# EAGLE board wt12_breakout_board_laen (EAGLE 5.09)
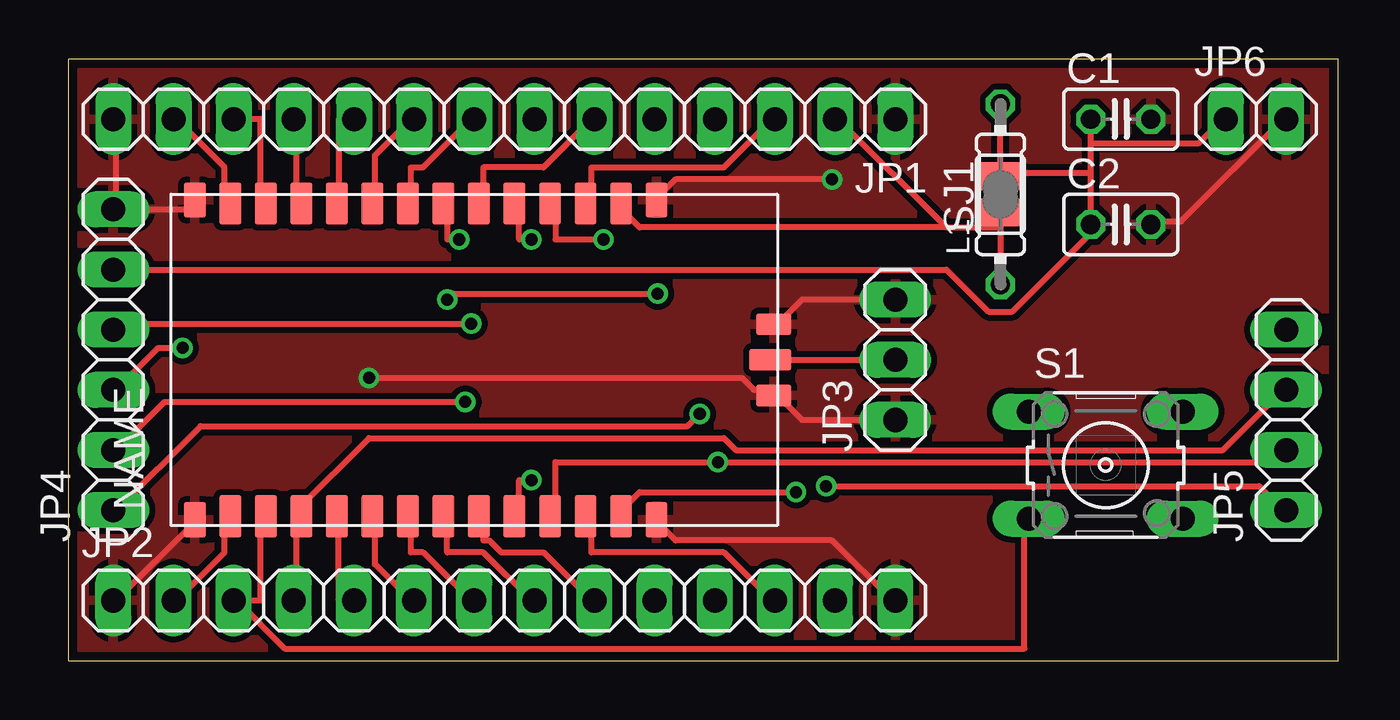
[diagram p0: board, top side]
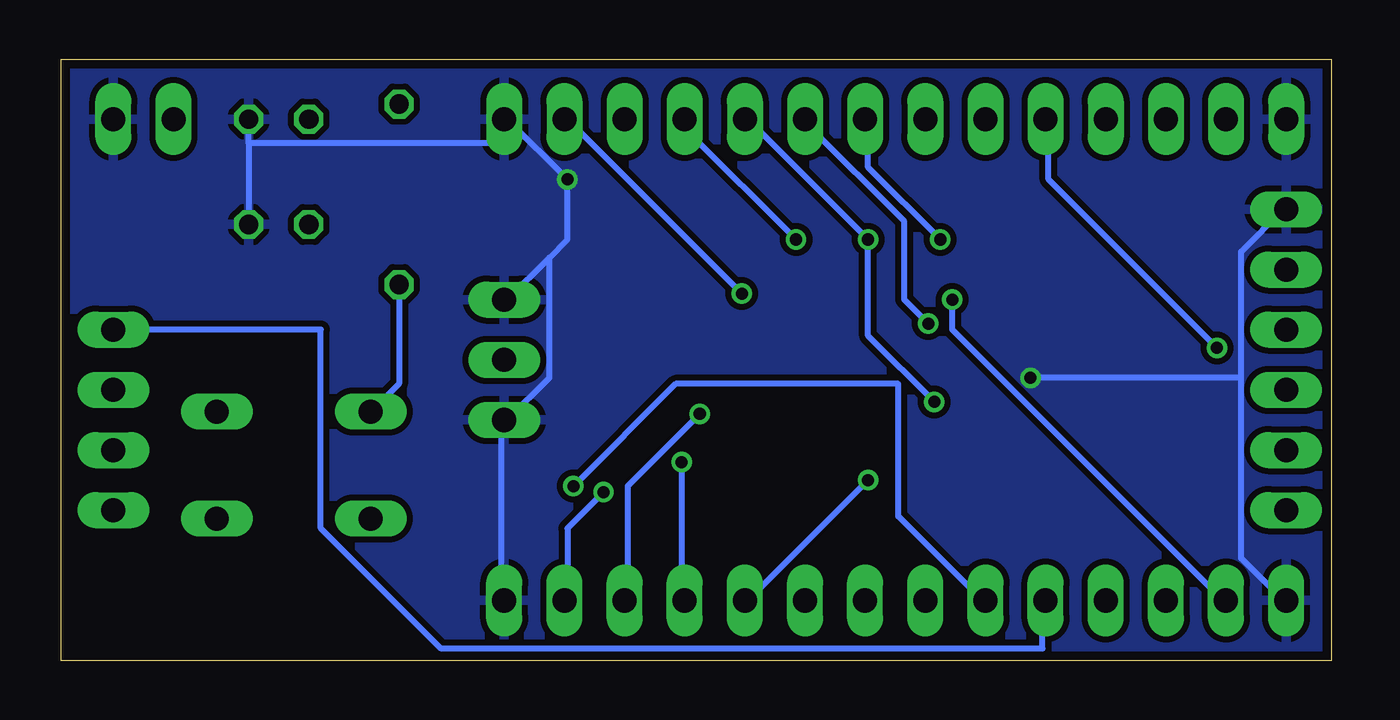
[diagram p1: board, bottom side, seen from below]

Size 53.65 x 25.39 mm. Coordinates in mm from the lower left corner, seen from the top.
Outline: 0,0 53.65,0 53.65,25.39 0,25.39 0,0
Copper layers (1*16): Top 0.0356mm / dielectric 1.5011mm / Bottom 0.0356mm
Design rules "LaenPCBOrder": minimum track width 6mil, minimum drill 13mil, track to track 6mil, track to pad 6mil, pad to pad 6mil, via to via 6mil, smd to smd 6mil, copper to edge 15mil, drill to drill 6mil, minimum pad ring 7mil, minimum via ring 7mil, stop-mask expansion 4mil, vias tented up to drill 0mil, thermal gap 10mil
Net classes: 0 default: width 0.254 mm, drill 0.508 mm, clearance 0.254 mm

## Footprints (pad centres in the part's own frame; a part is rotated, then mirrored left to right if it is on the bottom)
C025-025X050 = drill 0.813 octagon: 1 -1.27,0; 2 1.27,0
1X14 = drill 1.016 long: 1 -16.51,0; 2 -13.97,0; 3 -11.43,0; 4 -8.89,0; 5 -6.35,0; 6 -3.81,0; 7 -1.27,0; 8 1.27,0; 9 3.81,0; 10 6.35,0; 11 8.89,0; 12 11.43,0; 13 13.97,0; 14 16.51,0
1X03 = drill 1.016 long: 1 -2.54,0; 2 0,0; 3 2.54,0
1X06 = drill 1.016 long: 1 -6.35,0; 2 -3.81,0; 3 -1.27,0; 4 1.27,0; 5 3.81,0; 6 6.35,0
1X04 = drill 1.016 long: 1 -3.81,0; 2 -1.27,0; 3 1.27,0; 4 3.81,0
1X02 = drill 1.016 long: 1 -1.27,0; 2 1.27,0
0204/7 = drill 0.813 octagon: 1 -3.81,0; 2 3.81,0
B3F-10XX = drill 1.016 long: 1 -3.251,2.261; 2 3.251,2.261; 3 -3.251,-2.261; 4 3.251,-2.261
SJ = smd 1.168 x 1.6: 1 -0.762,0; 2 0.762,0
WT12 = smd 0.914 x 1.478: GND1 7.7,6.75; GND2 -11.8,6.75; GND3 -11.8,-6.75; GND4 7.7,-6.75 | smd 1.478 x 0.914: GND5 12.65,-1.5; GND6 12.65,1.5 | smd 0.914 x 1.778: MISO 0.2,-6.6; MOSI 1.7,-6.6; NC 6.2,-6.6; NCSB -2.8,-6.6; NCTS -5.8,6.6; NRTS 1.7,6.6; PCMC -8.8,6.6; PCMI -7.3,6.6; PCMO -1.3,6.6; PCMS -10.3,6.6; PIO2 4.7,6.6; PIO3 3.2,6.6; PIO4 -4.3,-6.6; PIO5 3.2,-6.6; PIO6 -7.3,-6.6; PIO7 -5.8,-6.6; RES -8.8,-6.6; RXD 0.2,6.6; SCLK -1.3,-6.6; TXD 4.7,-6.6; USB_D+ -2.8,6.6; USB_D- -4.3,6.6; VDD1 6.2,6.6; VDD2 -10.3,-6.6 | smd 1.778 x 0.914: RF 12.5,0

## Placement (x,y rotation side)
C1  100 nF  [C025-025X050]  44.45,22.86 0 top
C2  NP  [C025-025X050]  44.45,18.41 0 top
JP1  HEADER1  [1X14]  18.41,22.86 180 top
JP2  HEADER2  [1X14]  18.41,2.54 0 top
JP3  ANT  [1X03]  34.92,12.7 90 top
JP4  UART  [1X06]  1.91,12.7 90 top
JP5  BYPASS  [1X04]  51.44,10.16 90 top
JP6  POWER  [1X02]  50.16,22.86 0 top
L1  10 nH  [0204/7]  39.37,19.68 90 top
S1  RESET  [B3F-10XX]  43.81,8.26 0 top
SJ1  PWR  [SJ]  39.37,19.68 90 top
U1  WT12  [WT12]  17.14,12.7 0 top

## Library data of the parts
C1 C2 L1 = resistor
JP1-JP6 = pinhead
S1 = switch-omron; MPN: B3F-1000; OC_FARNELL: 176432; OC_NEWARK: 36M3542
SJ1 = jumper
U1 = wt12

## Nets
3V3: C1.1 C2.1 JP4.5 JP6.1 L1.2 SJ1.2
GND: C1.2 C2.2 JP1.1 JP1.14 JP2.1 JP2.14 JP3.1 JP3.3 JP4.6 JP6.2 U1.GND1 U1.GND2 U1.GND3 U1.GND4 U1.GND5 U1.GND6
MISO: JP2.9 U1.MISO
MOSI: JP2.10 U1.MOSI
NC: JP2.13 U1.NC
NCSB: JP2.7 U1.NCSB
NCTS: JP1.10 JP4.3 U1.NCTS
NRTS: JP1.5 JP4.2 U1.NRTS
PCMC: JP1.12 U1.PCMC
PCMI: JP1.11 U1.PCMI
PCMO: JP1.7 U1.PCMO
PCMS: JP1.13 U1.PCMS
PIO2: JP1.3 U1.PIO2
PIO3: JP1.4 U1.PIO3
PIO4: JP2.6 JP5.1 U1.PIO4
PIO5: JP2.11 JP5.2 U1.PIO5
PIO6: JP2.4 JP5.3 U1.PIO6
PIO7: JP2.5 JP5.4 U1.PIO7
RES: JP2.3 S1.3 U1.RES
RF: JP3.2 U1.RF
RXD: JP1.6 JP4.4 U1.RXD
SCLK: JP2.8 U1.SCLK
TXD: JP2.12 JP4.1 U1.TXD
USB_D+: JP1.8 U1.USB_D+
USB_D-: JP1.9 U1.USB_D-
VCC: JP1.2 JP2.2 L1.1 S1.1 SJ1.1 U1.VDD1 U1.VDD2

## Tracks (layer width: path | path; a pad name or v marks a point on that pad's centre or on a via)
3V3
  Top 0.254: 39.37,20.57 39.37,23.37 L1.2 | 39.37,20.57 SJ1.2 39.37,20.57 | 43.18,21.84 C1.1 | 43.18,20.57 43.18,21.84 | 43.18,20.57 43.18,18.54 C2.1 43.18,18.29 43.18,18.03 39.88,14.73 38.86,14.73 37.08,16.51 2.03,16.51 JP4.5 | 43.18,21.84 47.75,21.84 48.77,22.86 JP6.1 | 43.18,20.57 39.37,20.57
GND  (via drill 0.51)
  Top 0.254: U1.GND3 5.33,5.84 2.03,2.54 JP2.1 | 2.03,19.05 5.08,19.05 5.33,19.3 U1.GND2 | 2.03,19.05 JP4.6 2.03,19.05 | 2.03,19.05 2.03,22.86 JP1.14 | JP3.1 34.8,10.16 30.99,10.16 29.97,11.18 U1.GND5 29.72,11.43 28.96,11.43 28.45,11.94 v12.7,11.94 | U1.GND4 24.89,5.84 25.65,5.08 32.26,5.08 34.8,2.54 JP2.14 | JP6.2 51.31,22.86 46.99,18.54 45.72,18.54 C2.2 | U1.GND6 29.97,14.22 30.99,15.24 34.8,15.24 JP3.3 | v32.26,20.32 25.65,20.32 24.89,19.56 U1.GND1
  Bottom 0.254: 3.81,11.94 3.81,17.27 2.03,19.05 JP4.6 | 3.81,11.94 3.81,4.32 2.03,2.54 JP2.1 | JP2.14 35.05,2.54 35.05,10.16 JP3.1 34.8,10.16 33.02,11.94 33.02,17.02 | 45.72,21.84 C1.2 | 45.72,21.84 45.72,18.54 C2.2 | 33.02,17.02 32.26,17.78 v32.26,20.32 34.8,22.86 JP1.1 35.05,22.86 35.05,21.84 45.72,21.84 | 33.02,17.02 34.8,15.24 JP3.3 | 3.81,11.94 v12.7,11.94
  pour Bottom: 0,25.4 53.34,25.4 53.34,0 0,0
  pour Top: 0,25.4 53.34,25.4 53.34,0 0,0
MISO
  Top 0.254: U1.MISO 17.53,6.1 17.53,5.08 17.78,5.08 18.29,4.57 20.07,4.57 22.1,2.54 JP2.9
MOSI  (via drill 0.51)
  Top 0.254: v19.56,7.62 19.05,7.62 19.05,6.35 U1.MOSI
  Bottom 0.254: v19.56,7.62 24.64,2.54 JP2.10
NC  (via drill 0.51)
  Top 0.254: v30.73,7.11 24.13,7.11 23.37,6.35 U1.NC
  Bottom 0.254: v30.73,7.11 32.26,5.59 32.26,2.54 JP2.13
NCSB
  Top 0.254: U1.NCSB 14.48,6.1 14.48,4.57 14.99,4.57 17.02,2.54 JP2.7
NCTS  (via drill 0.51)
  Top 0.254: U1.NCTS 11.43,19.3 11.43,22.86 11.94,22.86 JP1.10 | v4.83,13.21 3.81,13.21 2.03,11.43 JP4.3
  Bottom 0.254: v4.83,13.21 11.94,20.32 11.94,22.86 JP1.10
NRTS  (via drill 0.51)
  Top 0.254: v19.56,17.78 19.05,17.78 19.05,19.05 U1.NRTS | v16.76,10.92 4.06,10.92 2.03,8.89 JP4.2
  Bottom 0.254: JP1.5 24.64,22.86 v19.56,17.78 19.56,13.72 v16.76,10.92
PCMC
  Top 0.254: U1.PCMC 8.13,19.3 8.13,22.86 7.11,22.86 JP1.12
PCMI
  Top 0.254: U1.PCMI 9.65,19.3 9.65,22.86 JP1.11
PCMO  (via drill 0.51)
  Top 0.254: v16.51,17.78 16,17.78 16,19.05 U1.PCMO
  Bottom 0.254: v16.51,17.78 19.56,20.83 19.56,22.86 JP1.7
PCMS
  Top 0.254: U1.PCMS 6.6,19.3 6.6,20.83 4.57,22.86 JP1.13
PIO2
  Top 0.254: U1.PIO2 22.1,19.3 22.1,20.83 27.69,20.83 29.72,22.86 JP1.3
PIO3  (via drill 0.51)
  Top 0.254: v22.61,17.78 20.57,17.78 20.57,19.05 U1.PIO3
  Bottom 0.254: v22.61,17.78 27.18,22.35 27.18,22.86 JP1.4
PIO4  (via drill 0.51)
  Top 0.254: U1.PIO4 12.95,6.1 12.95,4.06 14.48,2.54 JP2.6 | v32,7.37 50.29,7.37 51.31,6.35 JP5.1
  Bottom 0.254: v32,7.37 27.69,11.68 18.29,11.68 18.29,6.1 14.73,2.54 JP2.6
PIO5  (via drill 0.51)
  Top 0.254: U1.PIO5 20.57,6.35 20.57,8.38 v27.43,8.38 50.8,8.38 51.31,8.89 JP5.2
  Bottom 0.254: v27.43,8.38 27.43,2.54 JP2.11
PIO6
  Top 0.254: JP2.4 9.65,2.54 9.65,6.1 U1.PIO6 9.65,6.35 12.7,9.4 27.69,9.4 28.19,8.89 48.77,8.89 51.31,11.43 JP5.3
PIO7
  Top 0.254: U1.PIO7 11.43,6.1 11.43,2.54 11.94,2.54 JP2.5
  Bottom 0.254: JP5.4 51.31,13.97 42.67,13.97 42.67,5.59 37.59,0.51 12.19,0.51 12.19,2.54 JP2.5
RES
  Top 0.254: 7.11,2.54 8.13,2.54 8.13,6.1 U1.RES | 7.11,2.54 JP2.3 7.11,2.54 | 7.11,2.54 9.14,0.51 40.39,0.51 40.39,5.84 S1.3
RF
  Top 0.254: U1.RF 29.72,12.7 34.8,12.7 JP3.2
RXD  (via drill 0.51)
  Top 0.254: U1.RXD 17.53,19.3 17.53,20.83 20.07,20.83 22.1,22.86 JP1.6 | v17.02,14.22 2.29,14.22 2.03,13.97 JP4.4
  Bottom 0.254: v17.02,14.22 18.03,15.24 18.03,18.54 22.1,22.61 22.1,22.86 JP1.6
SCLK
  Top 0.254: U1.SCLK 16,6.1 16,4.57 17.53,4.57 19.56,2.54 JP2.8
TXD  (via drill 0.51)
  Top 0.254: U1.TXD 22.1,6.1 22.1,4.57 27.69,4.57 29.72,2.54 JP2.12 | v26.67,10.41 26.16,9.91 5.59,9.91 2.03,6.35 JP4.1
  Bottom 0.254: v26.67,10.41 29.72,7.37 29.72,2.54 JP2.12
USB_D+
  Top 0.254: U1.USB_D+ 14.48,19.3 14.48,20.83 14.99,20.83 17.02,22.86 JP1.8
USB_D-
  Top 0.254: U1.USB_D- 12.95,19.3 12.95,21.34 14.48,22.86 JP1.9
VCC  (via drill 0.51)
  Top 0.254: U1.VDD2 6.6,6.1 6.6,4.57 4.57,2.54 JP2.2 | 39.37,18.29 39.37,16 L1.1 | 39.37,18.29 39.37,18.8 SJ1.1 | 37.08,18.29 39.37,18.29 | 37.08,18.29 24.13,18.29 23.37,19.05 U1.VDD1 | 37.08,18.29 32.51,22.86 JP1.2 | v16,15.24 16.26,15.49 v24.89,15.49
  Bottom 0.254: S1.1 40.39,10.67 39.37,11.68 39.37,15.75 L1.1 | v16,15.24 16,13.97 4.57,2.54 JP2.2 | v24.89,15.49 32.26,22.86 JP1.2